# EAGLE board Powalowski_finalbrd2 (1) (EAGLE 7.7.0)
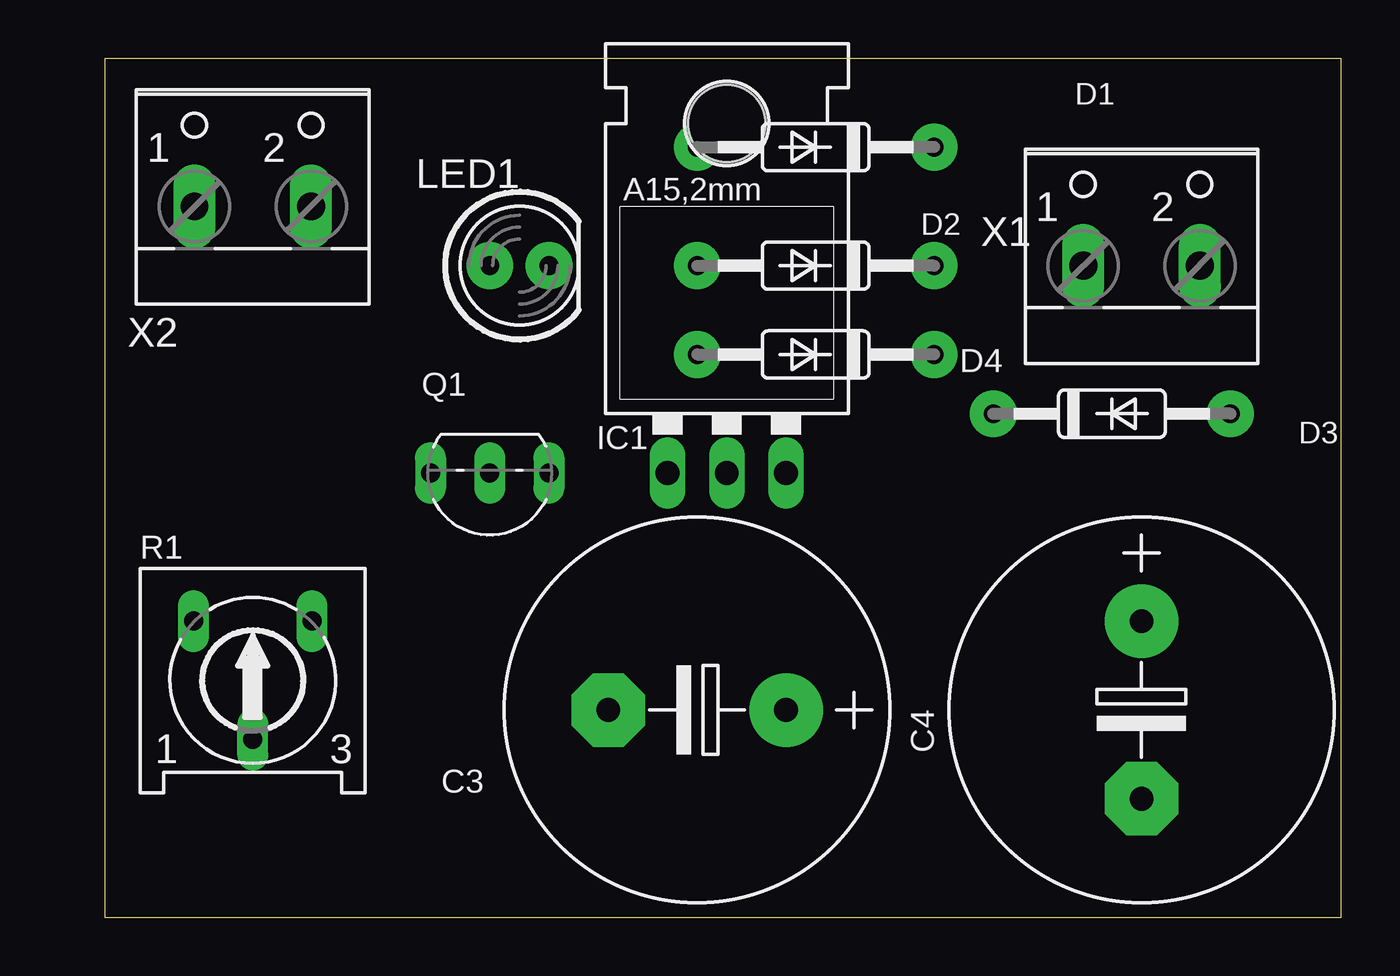
[diagram p0: board, top side]
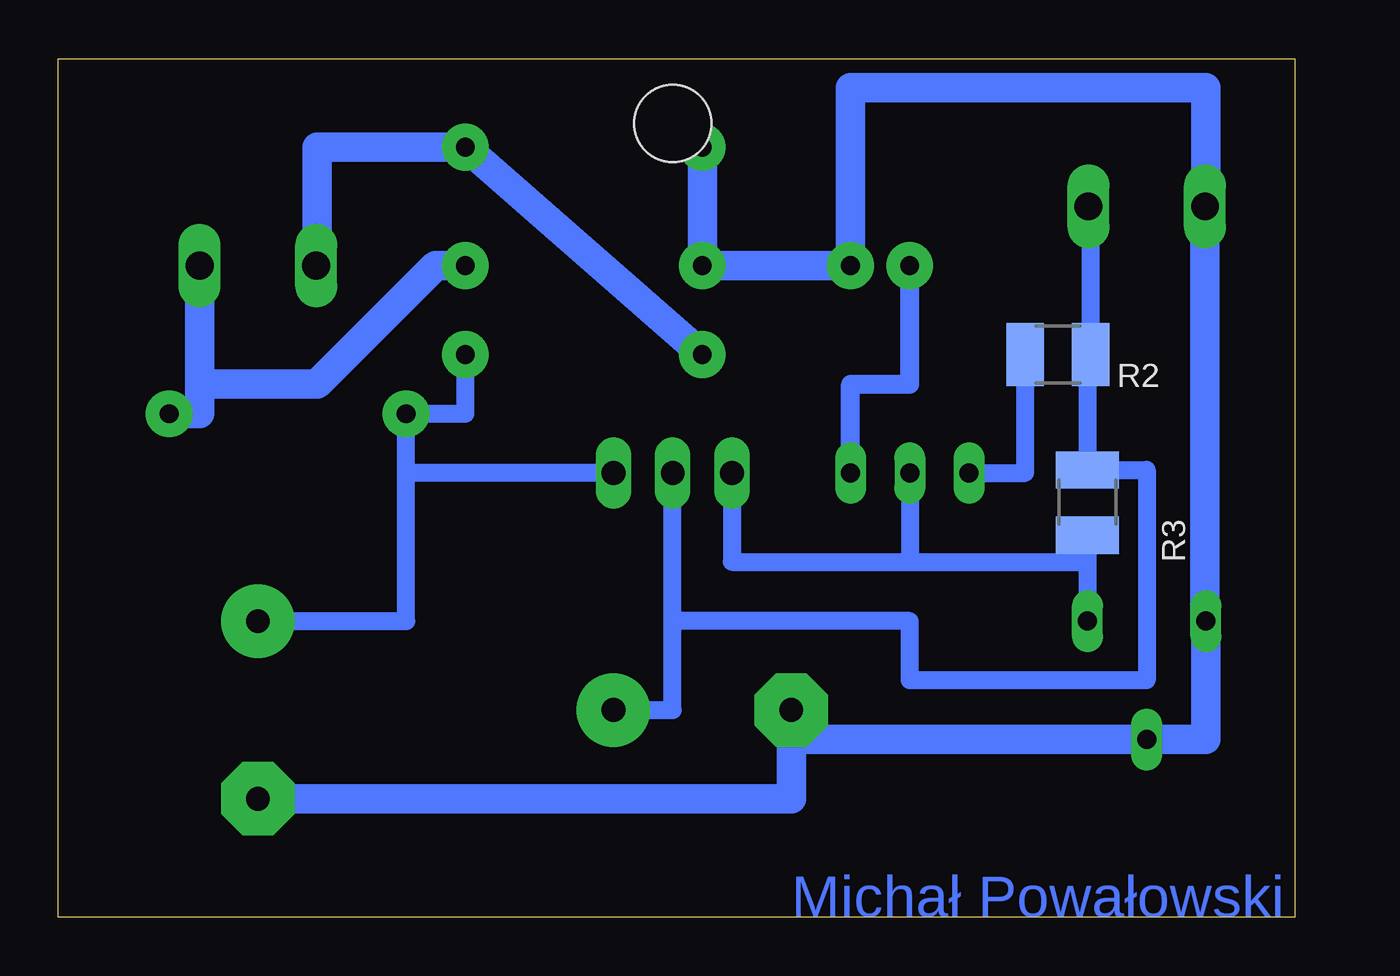
[diagram p1: board, bottom side, seen from below]

Size 53.01 x 36.82 mm. Coordinates in mm from the lower left corner, seen from the top.
Outline: 0,0 53.01,0 53.01,36.82 0,36.82 0,0
Copper layers (1*16): Top 0.035mm / dielectric 1.5mm / Bottom 0.035mm
Design rules "default": minimum track width 10mil, minimum drill 24mil, track to track 8mil, track to pad 8mil, pad to pad 8mil, via to via 8mil, smd to smd 8mil, copper to edge 40mil, drill to drill 8mil, minimum pad ring 10mil, minimum via ring 8mil, stop-mask expansion 4mil, vias tented up to drill 0mil, thermal gap 10mil

## Footprints (pad centres in the part's own frame; a part is rotated, then mirrored left to right if it is on the bottom)
E7,5-16 = drill 1.016 pad 3.15: + -3.81,0 | drill 1.016 pad 3.15 octagon: - 3.81,0
DIODE_DO35-10 = drill 0.8 pad 2: A 5.08,0; C -5.08,0
TO220L1 = drill 1.016 long: 1 -2.54,-3.81; 2 0,-3.81; 3 2.54,-3.81 | hole 3.302: 0,11.176
LED_LED5MM = drill 0.8 pad 2: A -1.27,0; K 1.27,0
TO92-EBC = drill 0.813 long: B 0,-1.27; C -2.54,-1.27; E 2.54,-1.27
RS3 = drill 0.813 long: A -2.54,2.54; E 2.54,2.54; S 0,-2.54
R1210 = smd 1.6 x 2.7: 1 -1.4,0; 2 1.4,0
W237-102 = drill 1.194 long: 1 -2.5,-1.27; 2 2.5,-1.27

## Placement (x,y rotation side)
C3  47u, 25V  [E7,5-16]  25.4,8.89 180 top
C4  1000u, 25V  [E7,5-16]  44.45,8.89 270 top
D1  DIODE_1N4148DO35-10  [DIODE_DO35-10]  30.48,33.02 180 top
D2  DIODE_1N4148DO35-10  [DIODE_DO35-10]  30.48,27.94 180 top
D3  DIODE_1N4148DO35-10  [DIODE_DO35-10]  43.18,21.59 0 top
D4  DIODE_1N4148DO35-10  [DIODE_DO35-10]  30.48,24.13 180 top
IC1  LM317MBT  [TO220L1]  26.67,22.86 0 top
LED1  [LED_LED5MM]  17.78,27.94 0 top
Q1  BC557  [TO92-EBC]  16.51,17.78 180 top
R1  22k  [RS3]  6.35,10.16 0 top
R2  68  [R1210]  10.16,24.13 0 bottom
R3  240  [R1210]  8.89,17.78 90 bottom
X1  [W237-102]  44.45,29.21 0 top
X2  [W237-102]  6.35,31.75 0 top

## Library data of the parts
C3 C4 = rcl
D1-D4 = bbbbb
IC1 = v-reg
LED1 = aaaaa
Q1 = transistor-pnp
R1 = pot
R2 R3 = resistor
X1 X2 = con-wago-500; MPN: 237-102; OC_FARNELL: unknown; OC_NEWARK: 70K9898

## Nets
N$1: D1.C D4.A X1.1
N$2: C3.- C4.- D1.A D2.A LED1.K R1.A R1.S X2.1
N$3: LED1.A Q1.C
N$4: C4.+ D3.C D4.C IC1.3
N$5: D2.C D3.A X1.2
N$7: C3.+ IC1.2 R2.2 R3.2 X2.2
N$8: IC1.1 Q1.B R1.E R3.1
N$10: Q1.E R2.1

## Tracks (layer width: path | path; a pad name or v marks a point on that pad's centre or on a via)
N$1
  Bottom 0.762: X1.1 41.91,27.94
  Bottom 1.27: D4.A D1.C 41.91,33.02 41.91,27.94
N$2
  Bottom 0.762: X2.1 3.81,30.48 | R1.A 3.85,12.7
  Bottom 1.27: D1.A D2.A LED1.K 19.05,35.56 3.81,35.56 3.81,30.48 | R1.A 3.81,7.62 R1.S 21.59,7.62 | C3.- 21.59,7.62 | 21.59,7.62 21.59,5.08 C4.- | 3.85,12.7 X2.1
N$3
  Bottom 0.813: Q1.C 19.05,22.86 16.51,22.86 LED1.A
N$4
  Bottom 0.762: C4.+ 38.1,12.7 38.1,19.05 | 38.1,19.05 D3.C 35.56,21.59 D4.C | IC1.3 38.1,19.05
N$5
  Bottom 1.27: D3.A 46.95,21.59 46.95,22.86 | 46.95,22.86 X1.2 | D2.C 36.83,27.94 41.91,22.86 46.95,22.86
N$7
  Bottom 0.762: X2.2 8.76,30.48 R2.2 8.89,24.13 R3.2 6.35,19.18 6.35,10.16 16.51,10.16 16.51,12.7 26.67,12.7 | C3.+ 26.67,8.89 26.67,12.7 | 26.67,12.7 IC1.2
N$8
  Bottom 0.762: R3.1 8.89,15.24 | 8.89,15.24 R1.E | IC1.1 24.13,15.24 16.51,15.24 | Q1.B 16.51,15.24 | 16.51,15.24 8.89,15.24
N$10
  Bottom 0.762: Q1.E 11.56,19.05 R2.1

## Text on the board
Bottom: Michał Powałowski